# EAGLE board ece3400_pcb (EAGLE 7.5.0)
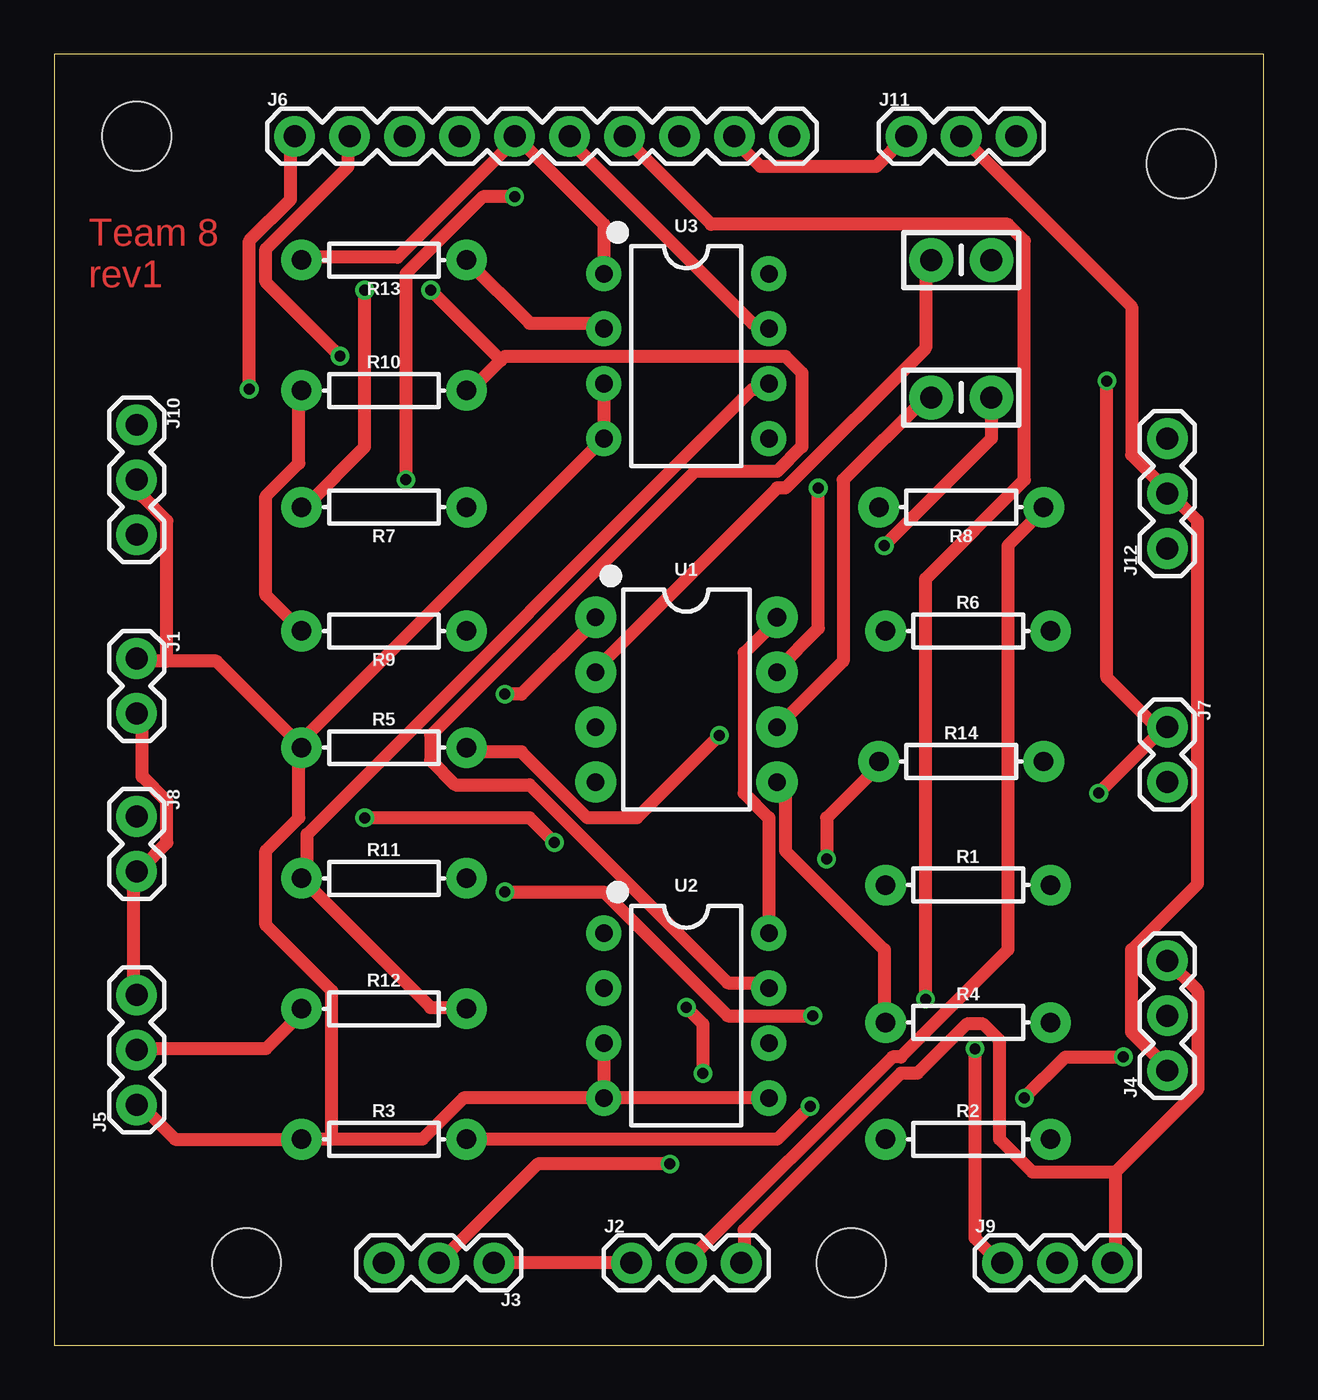
[diagram p0: board, top side]
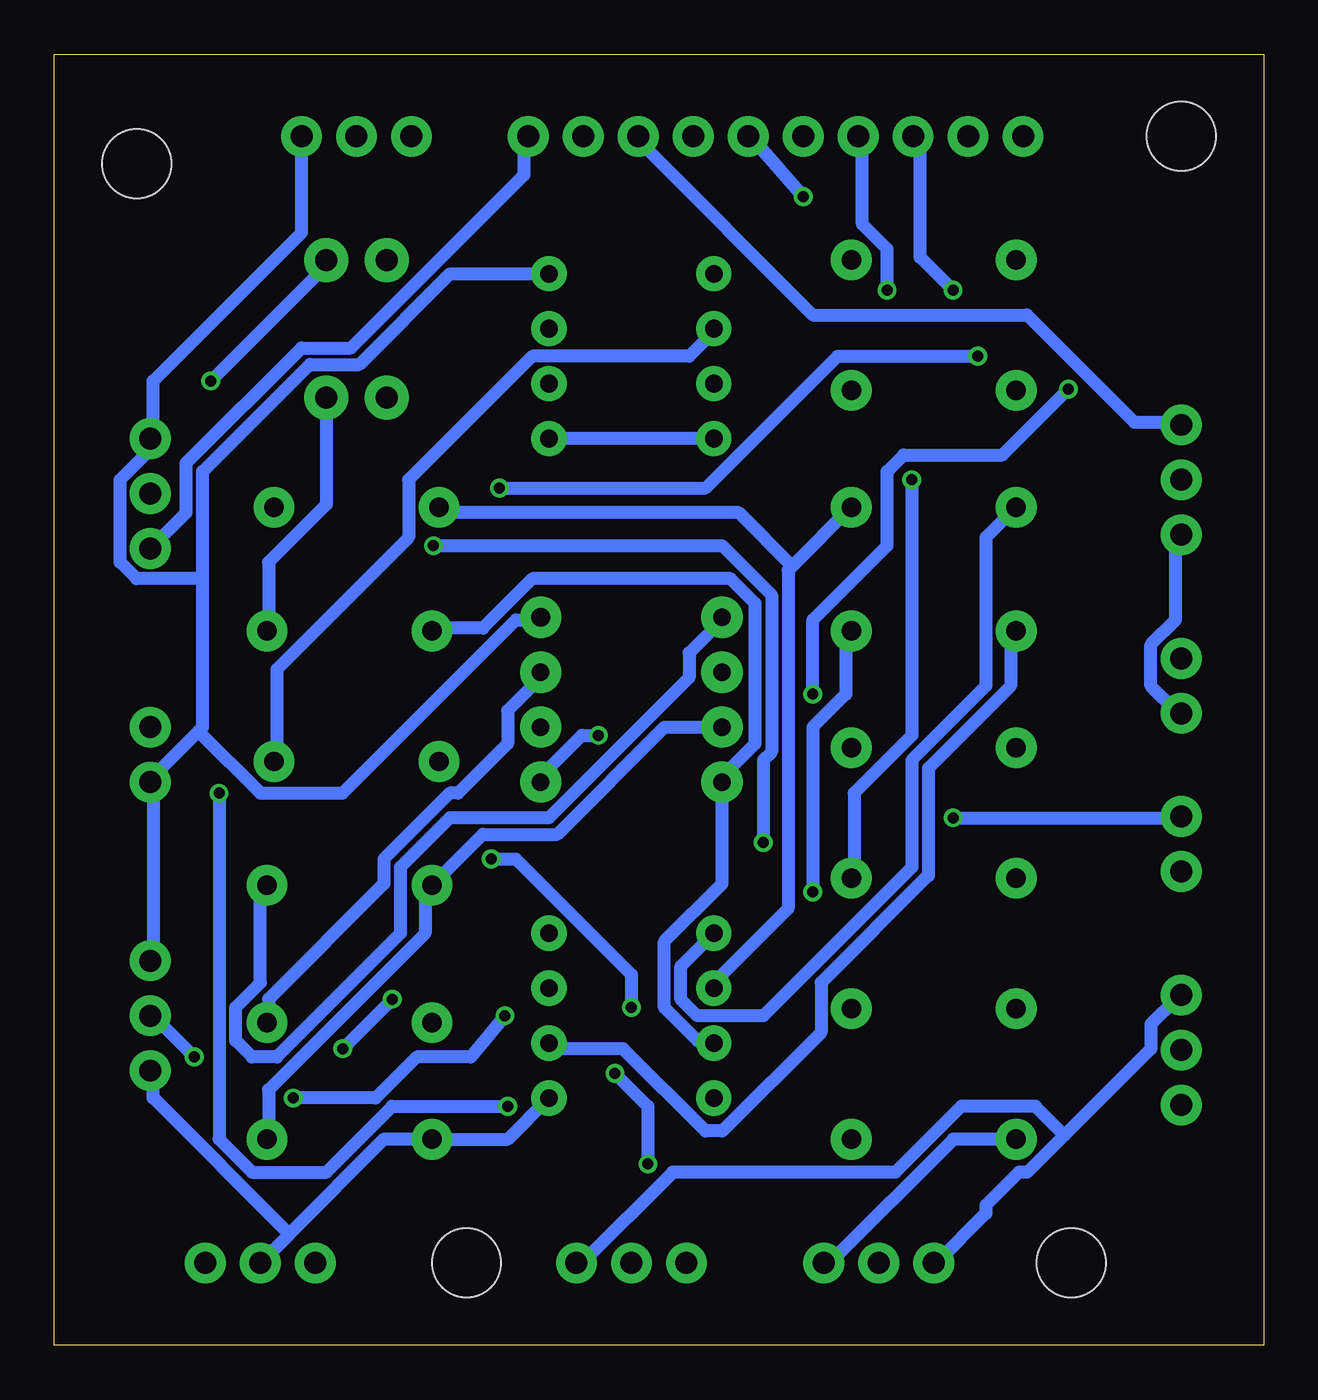
[diagram p1: board, bottom side, seen from below]

Size 55.88 x 59.68 mm. Coordinates in mm from the lower left corner, seen from the top.
Outline: 0,0 55.88,0 55.88,59.68 0,59.68 0,0
Copper layers (1*16): Top 0.0356mm / dielectric 1.5011mm / Bottom 0.0356mm
Design rules "LaenPCBOrder *": minimum track width 6mil, minimum drill 20mil, track to track 6mil, track to pad 6mil, pad to pad 6mil, via to via 6mil, smd to smd 6mil, copper to edge 100mil, drill to drill 100mil, minimum pad ring 7mil, minimum via ring 7mil, stop-mask expansion 3mil, vias tented up to drill 0mil, thermal gap 10mil
Net classes: 0 default: width 0.61 mm, drill 0.381 mm, clearance 0.152 mm
Holes 3.17 mm at 36.83,3.81 8.89,3.81 3.81,55.88 52.07,54.61

## Footprints (pad centres in the part's own frame; a part is rotated, then mirrored left to right if it is on the bottom)
CAP-PTH-SMALL-KIT = drill 1.016 pad 2.032: 1 -1.397,0; 2 1.397,0
1X02 = drill 1.016 pad 1.88: 1 0,0; 2 2.54,0
1X03 = drill 1.016 pad 1.88: 1 0,0; 2 2.54,0; 3 5.08,0
1X10 = drill 1.016 pad 1.88: 1 0,0; 2 2.54,0; 3 5.08,0; 4 7.62,0; 5 10.16,0; 6 12.7,0; 7 15.24,0; 8 17.78,0; 9 20.32,0; 10 22.86,0
AXIAL-0.3 = drill 0.9 pad 1.88: P$1 -3.81,0; P$2 3.81,0
DIP08-KIT = drill 0.813 pad 1.905: 1 -3.81,-4.191; 2 -1.27,-4.191; 3 1.27,-4.191; 4 3.81,-4.191; 5 3.81,4.191; 6 1.27,4.191; 7 -1.27,4.191 | drill 0.864 pad 1.905: 8 -3.81,4.191
DIP08 = drill 0.813 pad 1.626: 1 -3.81,-3.81; 2 -1.27,-3.81; 3 1.27,-3.81; 4 3.81,-3.81; 5 3.81,3.81; 6 1.27,3.81; 7 -1.27,3.81; 8 -3.81,3.81

## Placement (x,y rotation side)
C1  0.1uF  [CAP-PTH-SMALL-KIT]  41.91,50.16 180 top
C2  0.1uF  [CAP-PTH-SMALL-KIT]  41.91,43.81 180 top
J1  [1X02]  3.81,31.75 270 top
J2  455-1750-1-ND  [1X03]  26.67,3.81 0 top
J3  455-1750-1-ND  [1X03]  20.32,3.81 180 top
J4  455-1750-1-ND  [1X03]  51.44,12.7 90 top
J5  455-1750-1-ND  [1X03]  3.81,11.11 90 top
J6  [1X10]  11.11,55.88 0 top
J7  [1X02]  51.44,28.57 270 top
J8  [1X02]  3.81,24.45 270 top
J9  455-1750-1-ND  [1X03]  43.81,3.81 0 top
J10  455-1750-1-ND  [1X03]  3.81,42.55 270 top
J11  455-1750-1-ND  [1X03]  39.37,55.88 0 top
J12  455-1750-1-ND  [1X03]  51.44,36.83 90 top
R1  22k  [AXIAL-0.3]  42.23,21.27 0 top
R2  1k  [AXIAL-0.3]  42.23,9.53 0 top
R3  2k  [AXIAL-0.3]  15.24,9.53 0 top
R4  22k  [AXIAL-0.3]  42.23,14.92 0 top
R5  1k  [AXIAL-0.3]  15.24,27.62 0 top
R6  2k  [AXIAL-0.3]  42.23,33.02 0 top
R7  [AXIAL-0.3]  15.24,38.73 180 top
R8  [AXIAL-0.3]  41.91,38.73 180 top
R9  [AXIAL-0.3]  15.24,33.02 180 top
R10  [AXIAL-0.3]  15.24,44.13 0 top
R11  [AXIAL-0.3]  15.24,21.59 0 top
R12  [AXIAL-0.3]  15.24,15.56 0 top
R13  [AXIAL-0.3]  15.24,50.16 180 top
R14  [AXIAL-0.3]  41.91,26.99 0 top
U1  LM358  [DIP08-KIT]  29.21,29.84 270 top
U2  LM358  [DIP08]  29.21,15.24 270 top
U3  LM358  [DIP08]  29.21,45.72 270 top

## Library data of the parts
C1 C2 = SparkFun-Capacitors; PROD_ID: CAP-08370
J1 J7 J8 = SparkFun-Connectors
J2-J5 J9-J12 = SparkFun-Connectors; PROD_ID: XXX-00000
J6 = SparkFun-Connectors; PROD_ID: CONN-11563
R1-R14 = SparkFun-Resistors
U1-U3 = SparkFun-IC-Amplifiers; PROD_ID: IC-09172

## Nets
GND: J1.1 J2.1 J3.1 J4.1 J5.1 J9.2 J10.2 J11.2 J12.2 R2.P$1 R3.P$1 R5.P$1 R6.P$1 U1.4 U2.3 U2.4 U2.5 U3.3 U3.4 U3.5
IR1: J6.8 J10.1
IR2: J6.9 J11.1
IR3: J6.10 J12.1
LINE_INSIDE_LEFT: J3.2 R14.P$1
LINE_INSIDE_LEFT_OUT: J6.5 R13.P$2 U3.1
LINE_INSIDE_RIGHT: J2.2 R8.P$1
LINE_INSIDE_RIGHT_OUT: J6.3 R7.P$2 U2.1
LINE_OUTSIDE_LEFT: J5.2 R12.P$1
LINE_OUTSIDE_LEFT_OUT: J6.6 R11.P$2 U3.7
LINE_OUTSIDE_RIGHT: J4.2 R9.P$1
LINE_OUTSIDE_RIGHT_OUT: J6.4 R10.P$2 U2.7
MIC: J6.7 J9.1
N$1: R1.P$1 R2.P$2 U1.3
N$2: R4.P$1 R5.P$2 U1.5
N$3: C1.2 U1.2
N$6: C2.2 U1.6
N$7: C2.1 J8.1 R6.P$2
N$8: R7.P$1 R8.P$2 U2.2
N$9: R9.P$2 R10.P$1 U2.6
N$10: R11.P$1 R12.P$2 U3.6
N$11: R13.P$1 R14.P$2 U3.2
N$12: C1.1 J7.1 R3.P$2
TREASURE1_OUT: J6.1 R1.P$2 U1.1
TREASURE2_OUT: J6.2 R4.P$2 U1.7
VCC: J1.2 J2.3 J3.3 J4.3 J5.3 J7.2 J8.2 J9.3 J10.3 J11.3 J12.3 U1.8 U2.8 U3.8

## Tracks (layer width: path | path; a pad name or v marks a point on that pad's centre or on a via)
GND
  Top 0.61: U3.3 U3.4 11.3,27.81 | 5.21,31.62 7.49,31.62 11.3,27.81 | 5.21,31.62 4.06,31.62 J1.1 | 5.21,31.62 5.21,38.1 4.06,39.24 4.06,40.01 J10.2 | 11.3,27.81 R5.P$1 11.3,27.43 11.3,24.38 9.78,22.86 9.78,19.43 12.83,16.38 12.83,9.53 | J2.1 J3.1 | J5.1 4.06,11.05 5.59,9.53 R3.P$1 12.83,9.53 | J11.2 49.78,48.01 49.78,41.15 51.31,39.62 J12.2 51.69,39.24 52.83,38.1 52.83,21.34 49.78,18.29 49.78,14.48 51.31,12.95 J4.1 | U2.3 U2.4 | U2.5 U2.4 | 12.83,9.53 17.02,9.53 18.92,11.43 U2.4
  Bottom 0.61: U3.4 U3.5 | R3.P$1 14.35,9.53 20.07,3.81 J3.1 | R6.P$1 38.35,33.15 36.07,33.15 33.78,35.43 24.64,35.43 23.49,34.29 23.49,27.81 25.02,26.29 U1.4 25.02,21.34 27.69,18.67 27.69,15.62 26.16,14.1 25.4,14.1 U2.3 | U2.5 34.92,9.53 R2.P$1 40.64,9.53 45.02,5.14 | 45.02,5.14 J9.2 | 45.02,5.14 51.31,11.43 51.31,12.57 J4.1
IR1
  Bottom 0.61: J10.1 4.06,42.67 5.97,42.67 10.92,47.62 20.83,47.62 28.83,55.63 J6.8
IR2
  Top 0.61: J11.1 37.97,54.48 32.64,54.48 31.5,55.63 J6.9
IR3
  Bottom 0.61: J12.1 49.78,38.48 49.78,40.77 44.45,46.1 42.16,46.1 34.16,54.1 34.16,55.63 J6.10
LINE_INSIDE_LEFT  (via drill 0.51)
  Top 0.61: J3.2 22.35,8.38 v28.45,8.38 | v29.97,12.57 29.97,14.86 v29.21,15.62 | v35.69,22.48 35.69,24.38 37.97,26.67 R14.P$1
  Bottom 0.61: v28.45,8.38 28.45,11.05 v29.97,12.57 | v29.21,15.62 29.21,17.14 34.54,22.48 v35.69,22.48
LINE_INSIDE_LEFT_OUT
  Top 0.61: U3.1 25.4,51.82 21.59,55.63 J6.5 21.21,55.63 15.88,50.29 11.68,50.29 R13.P$2
LINE_INSIDE_RIGHT
  Top 0.61: J2.2 38.73,13.34 39.12,13.34 44.07,18.29 44.07,36.96 45.59,38.48 R8.P$1
LINE_INSIDE_RIGHT_OUT  (via drill 0.51)
  Top 0.61: v14.35,48.77 14.35,41.53 11.68,38.86 R7.P$2
  Bottom 0.61: U2.1 26.92,17.53 26.92,16 26.16,15.24 23.11,15.24 16.26,22.1 16.26,27.05 12.83,30.48 12.83,37.34 R7.P$2 | v14.35,48.77 15.88,50.29 15.88,55.63 J6.3
LINE_OUTSIDE_LEFT
  Top 0.61: J5.2 4.06,13.72 9.78,13.72 11.3,15.24 R12.P$1
LINE_OUTSIDE_LEFT_OUT  (via drill 0.51)
  Top 0.61: U3.7 33.02,47.24 32.26,47.24 23.88,55.63 J6.6 | v16.26,40.01 16.26,49.53 19.81,53.09 v21.27,53.09
  Bottom 0.61: v16.26,40.01 16.26,28.19 18.92,25.53 18.92,21.72 R11.P$2 | v21.27,53.09 23.49,55.63 J6.6
LINE_OUTSIDE_RIGHT  (via drill 0.51)
  Top 0.61: v49.4,13.34 46.74,13.34 v44.83,11.43 | v35.05,15.24 31.11,15.24 25.4,20.95 v20.83,20.95
  Bottom 0.61: v49.4,13.34 51.31,15.24 J4.2 | v44.83,11.43 41.02,11.43 39.12,13.34 36.64,13.34 v35.05,15.24 | v20.83,20.95 20.83,28.57 19.3,30.1 19.3,32.77 R9.P$1
LINE_OUTSIDE_RIGHT_OUT  (via drill 0.51)
  Top 0.61: 20.64,45.53 19.3,44.2 R10.P$2 | 20.64,45.53 20.83,45.72 33.78,45.72 34.54,44.96 34.54,41.53 33.4,40.39 29.59,40.39 17.4,28.19 17.4,27.05 18.54,25.91 21.97,25.91 31.11,16.76 33.02,16.76 U2.7 | 20.64,45.53 v17.4,48.77
  Bottom 0.61: v17.4,48.77 17.4,50.67 18.54,51.82 18.54,55.63 J6.4
MIC  (via drill 0.51)
  Top 0.61: v40.26,16 40.26,35.43 44.83,40.01 44.83,51.05 44.07,51.82 30.35,51.82 26.54,55.63 J6.7 | v42.55,13.72 42.55,4.95 43.69,3.81 J9.1
  Bottom 0.61: v42.55,13.72 v40.26,16
N$1
  Bottom 0.61: R2.P$2 45.97,9.53 45.97,11.81 38.73,19.05 38.73,20.95 R1.P$1 36.07,23.62 32.64,23.62 27.69,28.57 U1.3
N$2  (via drill 0.51)
  Top 0.61: R4.P$1 38.35,15.24 38.35,18.29 33.78,22.86 33.78,25.53 33.4,25.91 U1.5 | v30.73,28.19 26.92,24.38 24.64,24.38 21.59,27.43 19.3,27.43 R5.P$2
  Bottom 0.61: v30.73,28.19 31.5,28.19 33.4,26.29 U1.5
N$3
  Top 0.61: U1.2 25.02,31.24 33.4,39.62 33.78,39.62 40.26,46.1 40.26,49.91 C1.2
N$6
  Top 0.61: U1.6 36.45,31.62 36.45,40.01 40.26,43.81 C2.2
N$7  (via drill 0.51)
  Top 0.61: v14.35,24.38 21.97,24.38 v23.11,23.24 | v38.35,36.96 43.31,41.91 C2.1
  Bottom 0.61: v14.35,24.38 4.06,24.38 J8.1 | v23.11,23.24 23.11,27.05 22.73,27.43 22.73,34.67 25.02,36.96 v38.35,36.96 | C2.1 43.31,38.86 45.97,36.2 45.97,33.15 R6.P$2
N$8
  Bottom 0.61: R7.P$1 21.78,36.01 | 21.78,36.01 21.97,35.81 21.97,20.19 25.4,16.76 U2.2 | 21.78,36.01 24.26,38.48 37.97,38.48 R8.P$2
N$9
  Top 0.61: R9.P$2 9.78,34.67 9.78,39.24 11.3,40.77 11.3,43.81 R10.P$1
  Bottom 0.61: U2.6 33.02,13.72 29.59,13.72 25.78,9.91 25.02,9.91 20.45,14.48 20.45,16.76 15.49,21.72 15.49,26.67 11.68,30.48 11.68,32.77 R9.P$2
N$10
  Top 0.61: U3.6 33.02,44.2 32.26,44.2 11.68,23.62 11.68,21.72 R11.P$1 17.4,15.62 18.92,15.62 R12.P$2
N$11
  Top 0.61: R13.P$1 21.97,47.24 25.4,47.24 U3.2
  Bottom 0.61: R14.P$2 45.59,27.05 45.59,31.24 39.5,37.34 39.5,40.01 33.78,45.72 26.54,45.72 25.4,46.86 U3.2
N$12  (via drill 0.51)
  Top 0.61: R3.P$2 33.4,9.53 v34.92,11.05 | v48.26,25.53 51.31,28.57 J7.1 50.93,28.57 48.64,30.86 v48.64,44.58
  Bottom 0.61: v34.92,11.05 40.26,11.05 43.31,8 46.74,8 48.26,9.53 v48.26,25.53 | v48.64,44.58 43.31,49.91 C1.1
TREASURE1_OUT  (via drill 0.51)
  Top 0.61: v9.02,44.2 9.02,51.05 10.92,52.96 10.92,55.63 J6.1 | v20.83,30.1 21.59,30.1 25.02,33.53 U1.1
  Bottom 0.61: v9.02,44.2 12.07,41.15 16.64,41.15 17.4,40.39 17.4,36.96 20.83,33.53 v20.83,30.1 | R1.P$2 46.35,20.95 46.35,16.76 47.5,15.62 47.5,14.1 46.74,13.34 45.59,13.34 39.88,19.05 39.88,22.1 37.59,24.38 33.02,24.38 26.54,30.86 26.54,32 25.02,33.53 U1.1
TREASURE2_OUT  (via drill 0.51)
  Top 0.61: v13.21,45.72 9.78,49.15 9.78,50.67 13.59,54.48 13.59,55.63 J6.2 | v35.31,39.62 35.31,33.15 33.4,31.24 U1.7
  Bottom 0.61: R4.P$2 45.97,15.24 45.97,16 40.64,21.34 40.64,22.48 37.59,25.53 37.21,25.53 34.92,27.81 34.92,29.34 33.4,30.86 U1.7 | v13.21,45.72 19.68,45.72 25.78,39.62 v35.31,39.62
VCC
  Top 0.61: J5.3 3.68,16.38 3.68,21.72 J8.2 4.06,22.1 5.21,23.24 5.21,25.15 4.06,26.29 4.06,28.96 J1.2 | 49.02,8 49.02,3.81 J9.3 | 49.02,8 52.83,11.81 52.83,16.38 J4.3 | U2.8 33.02,24.38 31.88,25.53 31.88,32 33.4,33.53 U1.8 | 49.02,8 45.21,8 43.69,9.53 43.69,14.1 42.93,14.86 42.16,14.86 39.88,12.57 39.12,12.57 31.88,5.33 31.88,3.81 J2.3
  Bottom 0.61: 9.21,9.72 5.21,13.72 5.21,14.86 4.06,16 J5.3 | 9.21,9.72 10.92,8 11.3,8 12.83,6.48 12.83,6.1 15.11,3.81 J3.3 | 9.21,9.72 10.54,11.05 13.97,11.05 17.02,8 27.3,8 31.5,3.81 J2.3 | J10.3 4.06,37.34 4.06,33.53 5.21,32.38 5.21,30.48 4.06,29.34 J1.2 | U3.8 37.59,49.53 41.78,45.34 44.07,45.34 49.02,40.39 49.02,35.43 | 49.02,35.43 49.02,28.57 49.21,28.38 | 49.21,28.38 51.31,26.29 J7.2 51.31,25.91 51.31,17.91 J4.3 | 49.02,35.43 52.07,35.43 52.83,36.2 52.83,40.01 51.69,41.15 51.69,41.91 J12.3 51.31,41.91 51.31,44.58 44.45,51.44 J11.3 | 49.21,28.38 46.35,25.53 42.55,25.53 34.54,33.53 33.4,33.53 U1.8

## Text on the board
Top: Team 8 / rev1